# Altium PCB BreakawayUSB.PcbDoc
Units mm, origin at the board's own origin, x right, y up, seen from the top; angles counter-clockwise.
Board outline 9 x 40 mm, 2 copper layers (Top Layer, Bottom Layer); 8 components, 2 nets, 19 pads, 8 vias.
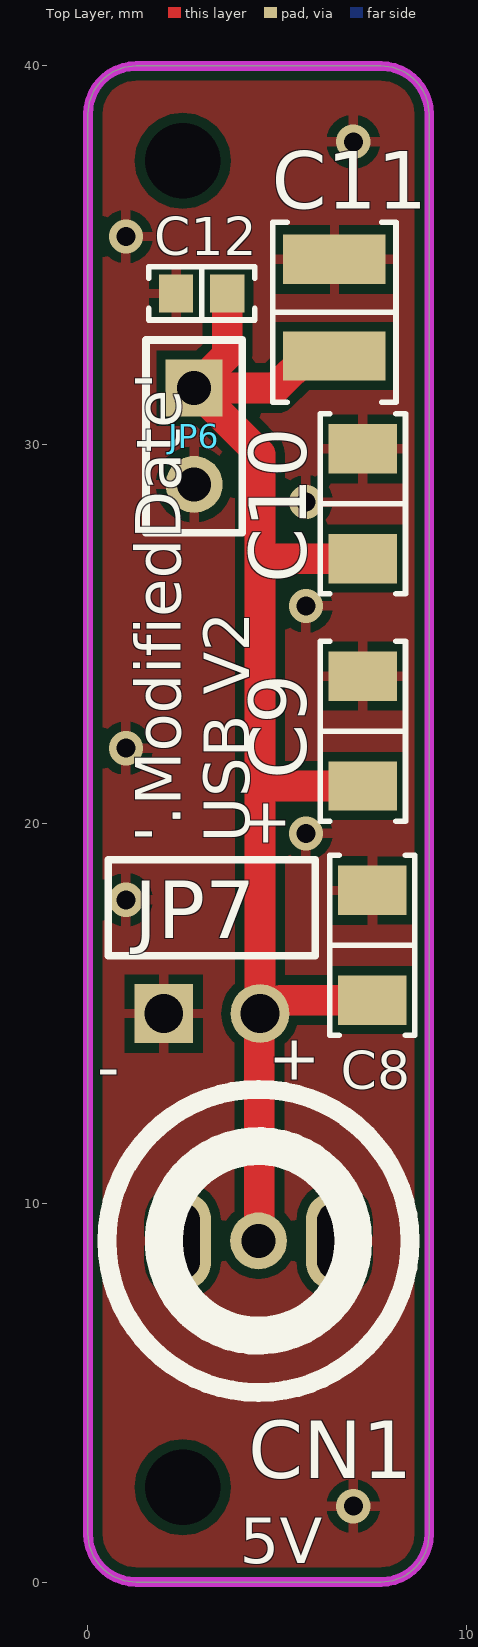
[diagram p0: Top Layer view]
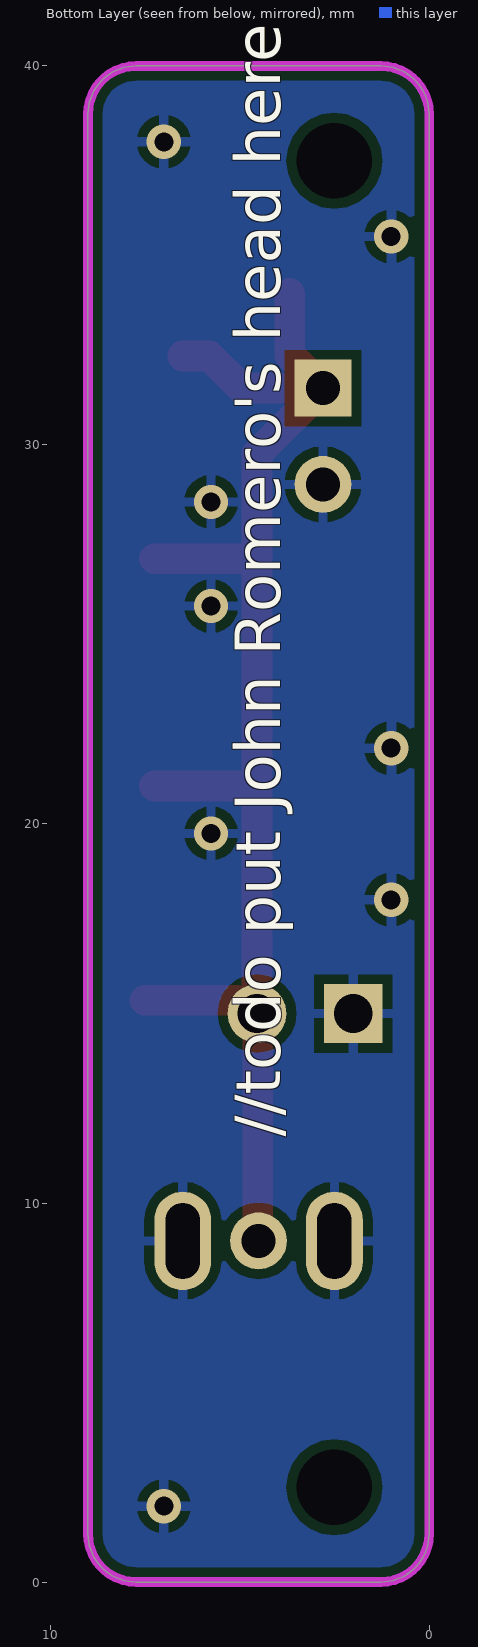
[diagram p1: Bottom Layer view, seen from below]
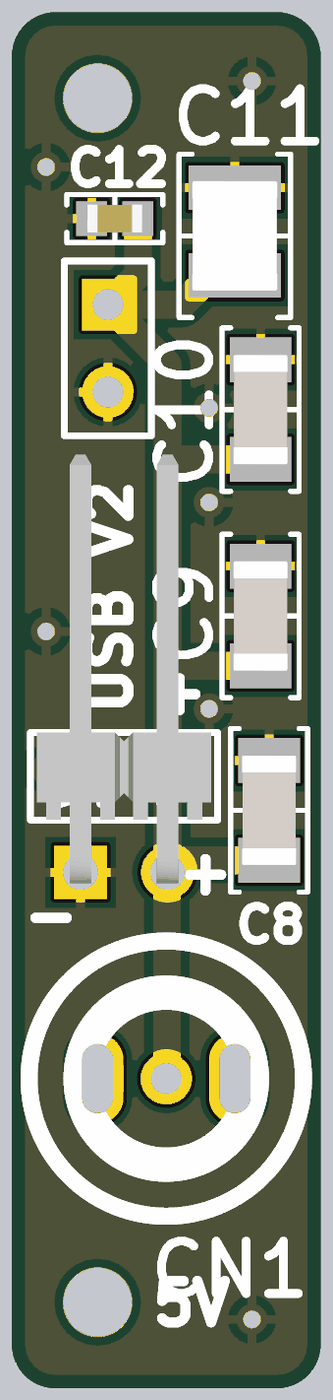
[diagram p2: 3D render of the assembled board from above, using the file's embedded part models]

## Layer stack, top to bottom
Top Solder: solder mask 0.0102, Solder Resist, Dk 3.5
Top Layer: signal copper 0.0356
Dielectric 1: dielectric 0.32, FR-4, Dk 4.8
Bottom Layer: signal copper 0.0356
Bottom Solder: solder mask 0.0102, Solder Resist, Dk 3.5

## Board outline
0,1.27 0,38.73 cw(c1.27,38.73) 1.27,40 7.73,40 cw(c7.73,38.73) 9,38.73 9,1.27 cw(c7.73,1.27) 7.73,0 1.27,0 cw(c1.27,1.27)

## Design rules (kind name [scope] priority, off if disabled: settings)
Clearance [All] p1: gap=0.254 ignorepadtopadclearanceinfootprint=FALSE except(0: Arc-Hole Track-Hole SMDPad-Hole THPad-Hole Via-Hole Fill-Hole Poly-Hole Region-Hole Text-Hole)
PolygonConnect [All] p1: connectstyle=Relief reliefconductorwidth=0.254 reliefentries=4 polygonreliefangle="90 Angle" airgapwidth=0.254
RoomDefinition BreakawayUSB [InComponentClass('BreakawayUSB')] p1: confinementstyle=ConfineIn formatcopy=TRUE lockcomponents=FALSE outline -0.5,4 9.5,4 9.5,34.5 -0.5,34.5
RoutingVias [All] p1: holewidth=0.9 width=0.5 viastyle="Through Hole" minholewidth=0.9 minwidth=0.5 maxholewidth=1.4 maxwidth=1
SolderMaskExpansion "Tent Vias" [IsVia] p1: expansion=0.102 istentingtop=TRUE
SolderMaskExpansion [All] p2: expansion=0.102 istentingtop=FALSE
Width [All] p1: maxlimit=0.813 minlimit=0.254 preferedwidth=0.406 minimp=50.000000 maximp=50.000000 favimp=50.000000
30 further rules are at their usual default settings.

## Components (designator, comment, footprint, x,y, rotation, side; value= is the part's Value field where it differs from the comment)
C8 "22µF" "CAP 1206_3216 - 1.0MM" 7.5,16.8 r90 top
C9 "22µF" "CAP 1206_3216 - 1.0MM" 7.25,22.45 r90 top
C10 "22µF" "CAP 1206_3216 - 1.0MM" 7.25,28.45 r90 top
C11 "4.7µF" "CAP 1210_3225 - 2.8MM" 6.5,33.5 r270 top
C12 "0.1µF" "CAP 0603_1608" 3,34 r0 top
CN1 "PHR-C4777-02-FVP-800" PHR-C4777-02-FVP-800 4.5,9 r0 top
JP6 "Header 2" HDR1X2 2.8,31.5 r270 top
JP7 "HMTSW-102-22-F-S-318-RA" SMTC-HMTSW-102-22-X-S-318-RA 2,15 r0 top

## Footprints (in the part's own frame and the unit in brackets; to place one, negate y for a bottom-side part, rotate by r counter-clockwise, add the part's x,y. Pads: shape width x height; smd on the part's side, far side on the other; paste and mask are expansions set on the pad)
"CAP 0603_1608" [mm] "Chip Capacitor, 2-Leads, Body 1.60x0.80mm, IPC Medium Density"
  rect 0.9x1 smd: 1(-0.675,0) 2(0.675,0)
  silkscreen extent -1.4,-0.7 1.4,0.7, body extent -0.8,-0.41 0.8,0.41, height 0.82
"CAP 1206_3216 - 1.0MM" [mm] "Chip Capacitor, 2-Leads, Body 3.25x1.60mm, IPC Medium Density"
  rect 1.3x1.8 smd: 1(-1.45,0) 2(1.45,0)
  silkscreen extent -2.37,-1.12 2.37,1.12, body extent -1.6,-0.8 1.6,0.8, height 1
"CAP 1210_3225 - 2.8MM" [mm] "Chip Capacitor, 2-Leads, Body 3.20x2.50mm, IPC Medium Density"
  rect 1.3x2.7 smd: 1(-1.4,0) 2(1.15,0)
  silkscreen extent -2.37,-1.63 2.37,1.63, body extent -1.6,-1.25 1.6,1.25, height 2.8
HDR1X2 [mm] "Connector; Header; 2 Position"
  rect 1.5x1.5 hole 0.9: 1(0,0)
  round 1.5 hole 0.9: 2(2.54,0)
  silkscreen extent -1.27,-1.27 3.81,1.27
PHR-C4777-02-FVP-800 [mm] "Magnetic circular connector"
  oval 1.5x2.6 hole 0.9 slot 2 at 90 deg: 0(-2,0) 0(2,0)
  round 1.5 hole 0.9: 1(0,0)
  silkscreen extent -4,-4 4,4, body extent -4,-4 4,4, height 5
SMTC-HMTSW-102-22-X-S-318-RA [mm] "Terminal Strip, 1x2 Pins, Right Angle, 2.54mm Pitch, Male"
  rect 1.55x1.55 hole 1.02: 1(0,0)
  round 1.55 hole 1.02: 2(2.54,0)
  silkscreen extent -1.46,1.52 4,4.06, body extent -1.27,-0.32 3.81,12.14, height 3.09

## Part data
C8 C9 C10: library part LMK316BJ226MD-T, "CAP CER 22UF 10V X5R 1206", Device Package="1206 (3216 Metric)", Manufacturer="Taiyo Yuden", Operating Temperature="-55°C ~ 85°C", Supplier Part Number 1=587-2233-1-ND, Temperature Coefficient=X5R, Tolerance=±20%, Voltage - Rated=10V, Applications="General Purpose", Capacitance=22µF, ComponentLink1Description=Datasheet, ComponentLink1URL=https://www.yuden.co.jp/productdata/catalog/mlcc01_e.pdf, ComponentLink2Description="DigiKey Link", ComponentLink2URL=http://digikey.com/product-detail/en/taiyo-yuden/LMK316BJ226MD-T/587-2233-1-ND/2002931, LastUpdated="1/21/2020 12:03:23 AM", Lifecycle Status=Active, Minimum Order=1, Mounting Type="Surface Mount, MLCC", Package / Case="1206 (3216 Metric)", Packaging=TapeAndReel, Part Number=LMK316BJ226MD-T, Part Status=Active, PartId=18964, Price=0.16, Series=M, Size / Dimension="0.126\" L x 0.063\" W (3.20mm x 1.60mm)", Supplier 1=DigiKey, Thickness (Max)="0.037\" (0.95mm)"
C11: library part UMK325B7475KM-T, "CAP CER 4.7UF 50V X7R 1210", Device Package="1210 (3225 Metric)", Manufacturer="Taiyo Yuden", Operating Temperature="-55°C ~ 125°C", Supplier Part Number 1=587-2673-1-ND, Temperature Coefficient=X7R, Tolerance=±10%, Voltage - Rated=50V, Applications="General Purpose", Capacitance=4.7µF, ComponentLink1Description=Datasheet, ComponentLink1URL=https://www.yuden.co.jp/productdata/catalog/mlcc01_e.pdf, ComponentLink2Description="DigiKey Link", ComponentLink2URL=http://digikey.com/product-detail/en/taiyo-yuden/UMK325B7475KM-T/587-2673-1-ND/2417260, LastUpdated="1/21/2020 12:30:50 AM", Lifecycle Status=Active, Minimum Order=1, Mounting Type="Surface Mount, MLCC", Package / Case="1210 (3225 Metric)", Packaging=TapeAndReel, Part Number=UMK325B7475KM-T, Part Status=Active, PartId=23636, Price=0.16, Series=M, Size / Dimension="0.126\" L x 0.098\" W (3.20mm x 2.50mm)", Supplier 1=DigiKey, Thickness (Max)="0.106\" (2.70mm)"
C12: library part C0603C104K5RAC7411, "CAP CER 0.1UF 50V X7R 0603", Device Package="0603 (1608 Metric)", Manufacturer=KEMET, Operating Temperature="-55°C ~ 125°C", Supplier Part Number 1=399-7374-2-ND, Temperature Coefficient=X7R, Tolerance=±10%, Voltage - Rated=50V, Applications="Bypass, Decoupling", Capacitance=0.1µF, ComponentLink1Description=Datasheet, ComponentLink1URL=https://api.kemet.com/component-edge/download/datasheet/C0603C104K5RAC7411.pdf, ComponentLink2Description="DigiKey Link", ComponentLink2URL=http://digikey.com/product-detail/en/kemet/C0603C104K5RAC7411/399-7374-2-ND/3317013, LastUpdated="1/21/2020 12:02:09 AM", Lifecycle Status=Active, Minimum Order=15000, Mounting Type="Surface Mount, MLCC", Package / Case="0603 (1608 Metric)", Packaging=TapeAndReel, Part Number=C0603C104K5RAC7411, Part Status=Active, PartId=2233, Price=0.02, Series="SMD Comm X7R", Size / Dimension="0.063\" L x 0.031\" W (1.60mm x 0.80mm)", Supplier 1=DigiKey, Thickness (Max)="0.035\" (0.90mm)"
CN1: "Magnetic circular connector"
JP6: "Header, 2-Pin", LatestRevisionDate=17-Jul-2002, LatestRevisionNote="Re-released for DXP Platform.", Publisher="Altium Limited"
JP7: "Modified .025\" SQ Post Header, Through-hole, Right Angle, -55 to 125 degC, 2.54 mm Pitch, 2-Pin, Male, RoHS", Manufacturer=Samtec, Temperature Range="-55 to 125 degC", ComponentLink1Description="Manufacturer URL", ComponentLink1URL=http://www.samtec.com, ComponentLink2Description=Datasheet, ComponentLink2URL=http://www.samtec.com/documents/webfiles/pdf/HMTSW.PDF, ComponentLink3Description="Package Specification", ComponentLink3URL=http://www.samtec.com/documents/webfiles/cpdf/HMTSW-XXX-XX-X-X-XXXX-XX-XX-MKT1.pdf, DatasheetVersion=F-214, Mounting Technology=Through-hole, Orientation="Right Angle", PackageDescription="Assembly .025 [.64] SQ. Post Hi-Temp Terminal Strip", PackageReference=HMTSW-102-22-X-S-318-RA, PackageVersion="AL, 3/1987", PartNumber=HMTSW-102-22-F-S-318-RA, Pitch="2.54 mm", RoHS=True

## Free pads (board coordinates)
  round 1.25 hole 2: K(2.5,2.5) K(2.5,37.5)

## Via types
v1: diameter 0.9, hole 0.5, Top Layer to Bottom Layer, tented both sides, 8 vias

## Nets (pads, with @x,y where several pads share a name; then routed paths per layer and width w, separated by ;. In a path a pad name is that pad's centre, name@x,y a point inside that pad or via, vN(x,y) a via of type N, cw(c..) or ccw(c..) an arc to the next point about the centre after c; other vN are vias at no path point)
GND: C8.2 C9.2 C10.2 C11.1 C12.1 CN1.0 JP6.2 JP7.1
  other v1: 7,2 1,18 5.75,19.75 1,22 5.75,25.75 5.75,28.5 1,35.5 7,38
VIN: C8.1 C9.1 C10.1 C11.2 C12.2 CN1.1 JP6.1 JP7.2 | length 38.7
  Top Layer w0.813: C12.2 3.675,32.375 JP6.1 ; CN1.1 4.52,9.02 4.52,14.98 JP7.2 ; C11.2 5.8,32.35 4.95,31.5 JP6.1 ; C9.1 4.54,21 ; C10.1 4.54,27 ; C8.1 5.089,15.35 4.739,15 JP7.2 ; JP6.1 4.54,29.76 4.54,27 ; JP7.2 4.54,21 ; 4.54,21 4.54,27

## Polygon pours and split planes (outlines as drawn)
GND on Bottom Layer "BOTTOM GND" (solid, pour order 2): 0,1.27 0,38.73 cw(c1.27,38.73) 1.27,40 7.73,40 cw(c7.73,38.73) 9,38.73 9,1.27 cw(c7.73,1.27) 7.73,0 1.27,0 cw(c1.27,1.27)
GND on Top Layer "TOP GND" (solid, pour order 0): 0,1.27 0,38.73 cw(c1.27,38.73) 1.27,40 7.73,40 cw(c7.73,38.73) 9,38.73 9,1.27 cw(c7.73,1.27) 7.73,0 1.27,0 cw(c1.27,1.27)

## Keep-outs
Keep-Out Layer:
  the board outline again, w0.254

## Silkscreen, mask and mechanical layers (free items; w line width, h text height)
Top Overlay:
  text "+" at 4,19.5 h1.2
  text "'.ModifiedDate' / USB V2" at 4.25,19.5 h1.2 r90
  text "+" at 4.75,13.25 h1.2
  text "-" at 0.25,13 h1.2
  text "5V" at 4,0.5 h1.2
Bottom Overlay:
  text "//todo put John Romero's head here" at 3.923,11.754 h1.2 r270